# EAGLE board ELEKTRA-PMIC v0.2-ful frame shield for astellated edges adjacent35X25 (EAGLE 9.6.2)
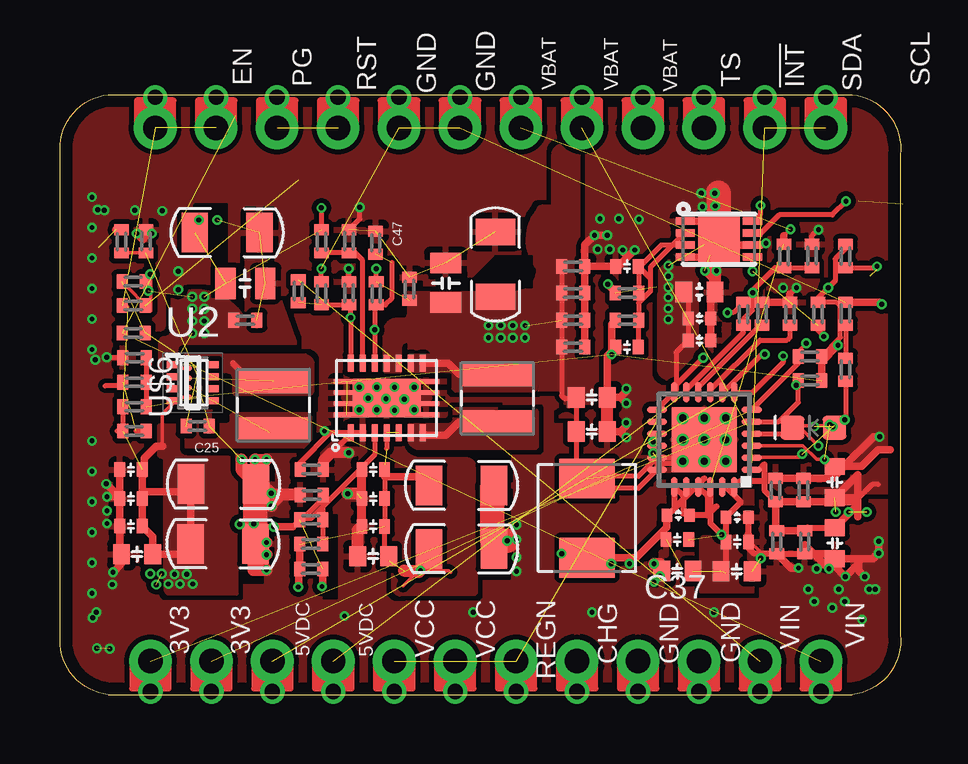
[diagram p0: board, top side]
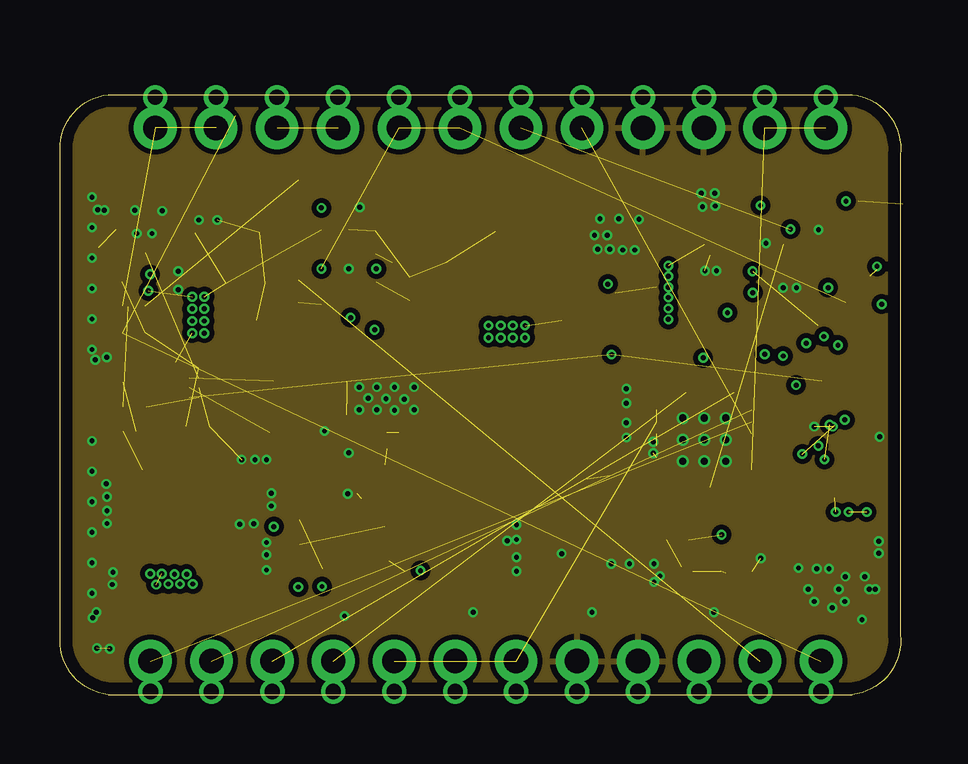
[diagram p1: board, inner layer Route2]
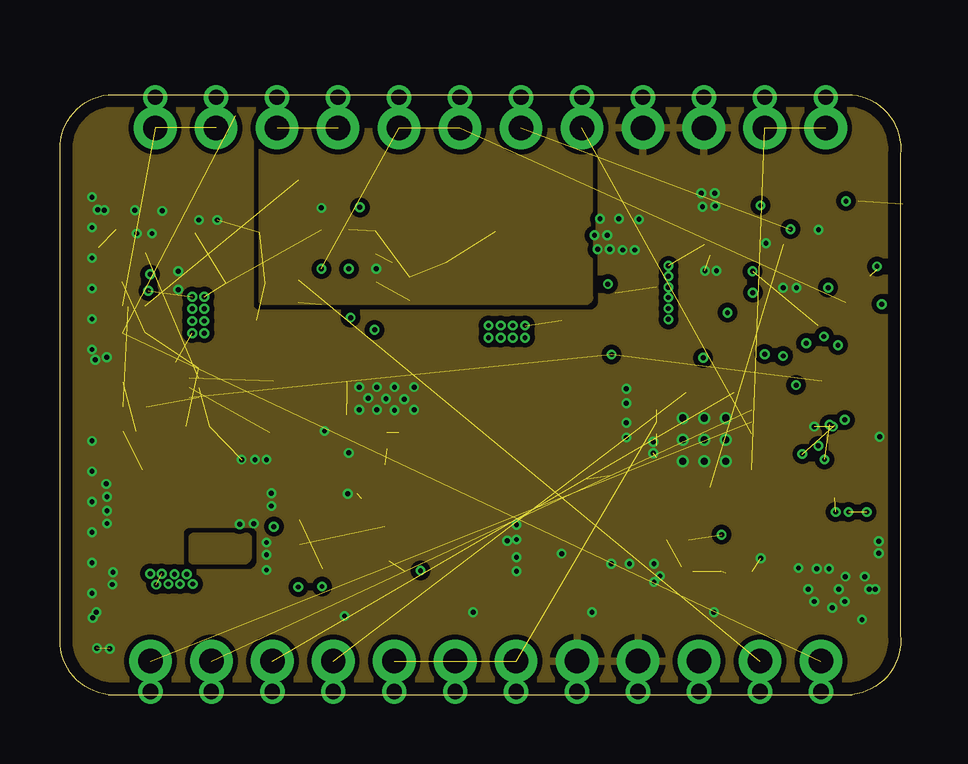
[diagram p2: board, inner layer Route15]
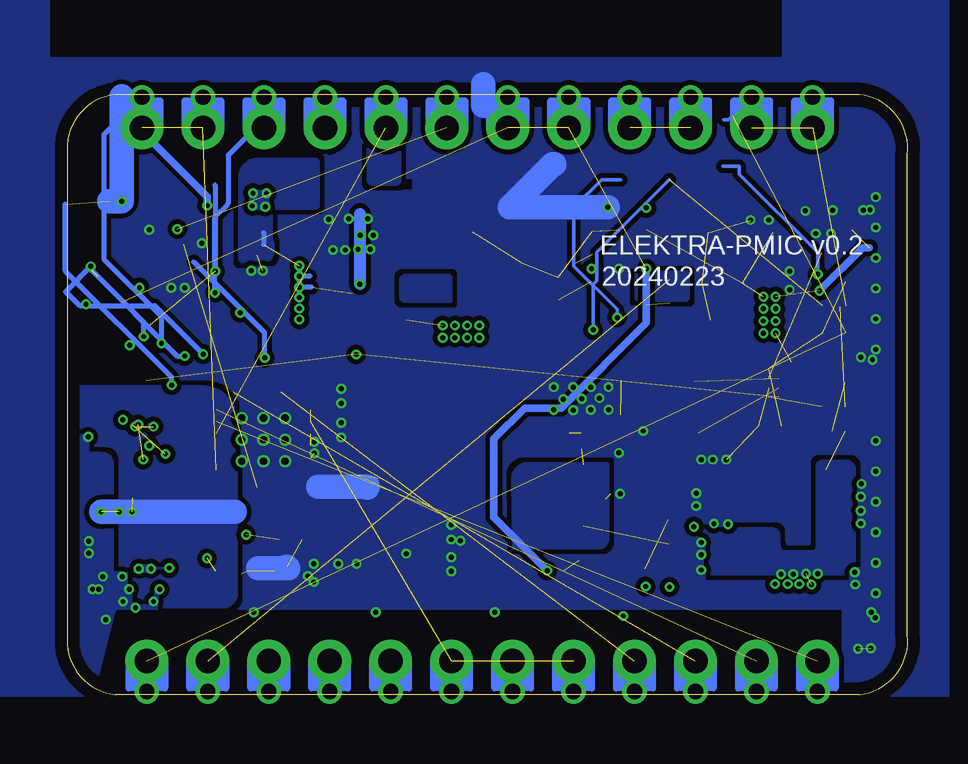
[diagram p3: board, bottom side, seen from below]

Size 35.03 x 25 mm. Coordinates in mm from the lower left corner, seen from the top.
Outline: 2.01,0 33.01,0 arc90 35.01,2.5 35.01,22.5 arc90 33.01,25 2.01,25 arc90 0.01,22.5 0.01,2.5 arc90 2.01,0
Copper layers (1+2*15+16): Top 0.035mm / dielectric 1.5mm / Route2 0.035mm / dielectric 0.15mm / Route15 0.035mm / dielectric 0.2mm / Bottom 0.035mm
Design rules "default *": minimum track width 4mil, minimum drill 8mil, track to track 8mil, track to pad 6mil, pad to pad 6mil, via to via 6mil, smd to smd 6mil, copper to edge 20mil, drill to drill 6mil, minimum pad ring 4mil, minimum via ring 4mil, stop-mask expansion 4mil, vias tented up to drill 16mil, thermal gap 10mil
Net classes: 0 default: width 0.152 mm, drill 0.203 mm, clearance 0.152 mm; 1 power: width 0.254 mm, drill 0.203 mm, clearance 0.203 mm; 3 BAT: drill 0.203 mm, clearance 0.203 mm; 4 3V3: width 0.305 mm, drill 0.203 mm, clearance 0.508 mm; 6 +3V3: width 0.203 mm, drill 0.203 mm, clearance 0.152 mm

## Footprints (pad centres in the part's own frame; a part is rotated, then mirrored left to right if it is on the bottom)
C0402_B = smd 0.457 x 0.61: 1 -0.483,0; 2 0.483,0
C-0402 = smd 0.45 x 0.55: 1 -0.47,0; 2 0.47,0
C0603 = smd 0.7 x 0.85: 1 -0.65,0; 2 0.65,0
C0402 = smd 0.45 x 0.6: 1 -0.47,0; 2 0.47,0
C-0603A = smd 0.7 x 0.85: 1 -0.65,0; 2 0.65,0
C0805 = smd 0.85 x 1.3: 1 -0.8,0; 2 0.85,0
C1206 = smd 1.1 x 1.65: 1 -1.35,0; 2 1.35,0
1X12-CASTELLATED = drill 1.016 pad 1.778: 1 0,-13.97; 2 0,-11.43; 3 0,-8.89; 4 0,-6.35; 5 0,-3.81; 6 0,-1.27; 7 0,1.27; 8 0,3.81; 9 0,6.35; 10 0,8.89; 11 0,11.43; 12 0,13.97 | drill 0.635 pad 1.016: @1 1.27,-13.97; @2 1.27,-11.43; @3 1.27,-8.89; @4 1.27,-6.35; @5 1.27,-3.81; @6 1.27,-1.27; @7 1.27,1.27; @8 1.27,3.81; @9 1.27,6.35; @10 1.27,8.89; @11 1.27,11.43; @12 1.27,13.97
LED-0603 = smd 1 x 1: A -0.877,0; C 0.877,0
INDUCTOR-VLS-E = smd 1 x 3: P$1 -1,0; P$2 1,0
INDUCTOR-4040 = smd 1.65 x 2.3: P$1 -1.65,0; P$2 1.65,0
R0402_B = smd 0.457 x 0.61: 1 -0.483,0; 2 0.483,0
TP0.7MM = smd 0.7 x 0.7: P$1 0,0
QFN24 = smd 0.85 x 0.28: 1 -1.975,1.25; 2 -1.975,0.75; 3 -1.975,0.25; 4 -1.975,-0.25; 5 -1.975,-0.75; 6 -1.975,-1.25; 13 1.975,-1.25; 14 1.975,-0.75; 15 1.975,-0.25; 16 1.975,0.25; 17 1.975,0.75; 18 1.975,1.25 | smd 0.28 x 0.85: 7 -1.25,-1.975; 8 -0.75,-1.975; 9 -0.25,-1.975; 10 0.25,-1.975; 11 0.75,-1.975; 12 1.25,-1.975; 19 1.25,1.975; 20 0.75,1.975; 21 0.25,1.975; 22 -0.25,1.975; 23 -0.75,1.975; 24 -1.25,1.975 | smd 2.7 x 2.7: PAD 0,0 | drill 0.3 pad 0.406: PAD@1 -0.9,0.9; PAD@2 0,0.9; PAD@3 0.9,0.9; PAD@4 -0.9,0; PAD@5 0,0; PAD@6 0.9,0; PAD@7 -0.9,-0.9; PAD@8 0,-0.9; PAD@9 0.9,-0.9
SOT538 = smd 0.475 x 0.3: 1 -0.838,0.754; 2 -0.838,0.254; 3 -0.838,-0.246; 4 -0.838,-0.746; 5 0.838,-0.746; 6 0.838,0.254; 7 0.838,-0.246; 8 0.838,0.754
TDFN-8 = smd 0.8 x 0.3: 1 -1.4,0.75; 2 -1.4,0.25; 3 -1.4,-0.25; 4 -1.4,-0.75; 5 1.4,-0.75; 6 1.4,-0.25; 7 1.4,0.25; 8 1.4,0.75 | smd 1.73 x 1.88: EP 0,0
TPS63020 = smd 0.25 x 0.7: 1 -1.5,-1.45; 2 -1,-1.45; 3 -0.5,-1.45; 4 0,-1.45; 5 0.5,-1.45; 6 1,-1.45; 7 1.5,-1.45; 8 1.5,1.45; 9 1,1.45; 10 0.5,1.45; 11 0,1.45; 12 -0.5,1.45; 13 -1,1.45; 14 -1.5,1.45 | smd 1.1 x 0.2: 15 -1.65,0.69; 16 -1.65,0.23; 17 -1.65,-0.23; 18 -1.65,-0.69; 19 1.65,-0.69; 20 1.65,-0.23; 21 1.65,0.23; 22 1.65,0.69 | smd 2.85 x 1.58: 23 0,0
DSBGA = smd 0.23 x 0.23: A1 -0.2,0.6; A2 0.2,0.6; B1 -0.2,0.2; B2 0.2,0.2; C1 -0.2,-0.2; C2 0.2,-0.2; D1 -0.2,-0.6; D2 0.2,-0.6

## Placement (x,y rotation side)
C1  100pF  [C0402_B]  21.39,16.73 180 top
C2  47nF  [C-0402]  25.76,7.47 180 top
C3  10uF  [C0603]  26.64,16.78 0 top
C4  1000pF  [C0402_B]  21.39,15.6 180 top
C5  10nF  [C0402]  23.63,14.48 180 top
C6  1uF  [C0402]  23.63,17.84 180 top
C7  10uF,25V  [C-0603A]  28.19,5.14 0 top
C8  0.1nF  [C0402_B]  21.39,14.48 180 top
C9  0.1nF  [C0402_B]  30.98,8.53 270 top
C10  100pF  [C0402_B]  29.81,8.53 270 top
C11  1000pF  [C0402_B]  29.87,6.36 90 top
C12  22uF 10V  [C0805]  7.7,17.13 0 top
C13  100nF  [C0402_B]  7.72,15.6 180 top
C14  NC  [C0402_B]  3.1,12 180 top
C15  100uF  [C1206]  6.82,8.77 0 top
C16  22uF  [C-0603A]  3.21,5.85 180 top
C17  0.1uF  [C0402]  28.22,6.36 180 top
C18  100pF  [C0402]  2.96,8.17 180 top
C19  1nF  [C0402]  2.96,9.38 180 top
C20  2.2uF  [C0402_B]  31.03,6.36 90 top
C21  10pF  [C0402_B]  21.39,17.84 180 top
C22  100uF 10V  [C1206]  6.97,19.26 0 top
C23  100uF  [C1206]  6.79,6.28 0 top
C24  0.1uF  [C0402]  2.96,7.02 180 top
C25  10nF  [C0402_B]  5.74,11.19 180 top
C26  22uF 10V  [C0805]  16.08,17.14 90 top
C27  100nF  [C0402_B]  14.57,16.91 270 top
C28  NC  [C0402_B]  10.46,6.27 180 top
C29  100uF  [C1206]  16.73,6.07 0 top
C30  22uF  [C-0603A]  13.05,5.77 180 top
C31  1nF  [C0402]  13.05,9.38 180 top
C32  100pF  [C0402]  13.05,8.17 180 top
C33  100uF 10V  [C1206]  18.14,17.93 90 top
C34  100uF  [C1206]  16.73,8.72 0 top
C35  0.1uF  [C0402]  13.05,7.01 180 top
C36  100nF  [C0402_B]  10.49,9.38 180 top
C37  4.7uF  [C0402]  25.72,6.46 180 top
C47  100nF  [C0402_B]  13.15,18.83 270 top
C49  10uF,25V  [C-0603A]  25.72,5.15 180 top
C57  10uF  [C-0603A]  32.28,6.31 270 top
C58  10uF  [C-0603A]  22.16,10.96 0 top
C59  10uF  [C-0603A]  22.16,12.39 0 top
C64  10uF  [C-0603A]  32.28,8.86 90 top
C72  0.1uF  [C-0402]  26.64,14.76 0 top
C73  1000pF  [C-0402]  26.64,15.68 0 top
C74  1000p  [C-0402]  28.22,7.39 180 top
CONN3  M12PTH-CST-R  [1X12-CASTELLATED]  17.94,23.62 90 top
CONN4  M12PTH-CST-R  [1X12-CASTELLATED]  17.74,1.4 270 top
D5  yellow  [LED-0603]  31.39,11.13 180 top
L1  2.2uH  [INDUCTOR-VLS-E]  8.89,12.07 270 top
L3  2.2uH  [INDUCTOR-VLS-E]  18.23,12.35 270 top
L7  2.2uH  [INDUCTOR-4040]  21.96,7.35 90 top
R1  0R  [R0402_B]  28.48,15.87 270 top
R2  10K  [R0402_B]  31.58,15.87 270 top
R3  10K  [R0402_B]  32.73,18.28 270 top
R4  1.1M  [R0402_B]  10.46,5.24 180 top
R5  180K  [R0402_B]  10.49,8.33 0 top
R6  62K  [R0402_B]  10.46,7.29 180 top
R7  150  [R0402_B]  23.63,15.6 0 top
R8  1M  [R0402_B]  3.1,10.98 180 top
R9  180K  [R0402_B]  3.1,14.04 0 top
R10  10K  [R0402_B]  30.41,15.87 270 top
R11  0R  [R0402_B]  32.73,15.87 90 top
R14  1M  [R0402_B]  3.07,17.21 180 top
R16  1M  [R0402_B]  2.56,18.89 270 top
R17  24K  [R0402_B]  3.1,13.02 180 top
R18  NC  [R0402_B]  3.58,18.89 90 top
R19  1M/NC  [R0402_B]  10.89,16.73 270 top
R20  0R/NC  [R0402_B]  12.04,16.73 90 top
R21  1M  [R0402_B]  13.18,16.73 270 top
R23  1M  [R0402_B]  10.89,18.89 270 top
R24  NC  [R0402_B]  12.04,18.89 90 top
R26  0R  [R0402_B]  9.93,16.8 90 top
R27  0R  [R0402_B]  3.07,15.08 180 top
R28  0R  [R0402_B]  3.07,16.21 180 top
R30  4K7  [R0402_B]  31.25,13.09 180 top
R33  160R  [R0402_B]  29.25,15.87 90 top
R34  31.2K  [R0402_B]  31.33,18.28 90 top
R35  5.49K  [R0402_B]  30.16,18.28 270 top
R36  4K7  [R0402_B]  31.25,14.09 180 top
R44  1K  [R0402_B]  32.73,13.53 90 top
R54  1K  [R0402_B]  23.63,16.73 0 top
TP1  TP  [TP0.7MM]  30.55,11.2 180 top
TP2  TP  [TP0.7MM]  32.28,11.22 180 top
U1  BQ24195L  [QFN24]  26.84,10.62 180 top
U2  TPS631000DRLR  [SOT538]  5.53,12.99 0 top
U4  MAX1704X  [TDFN-8]  27.45,18.99 0 top
U$3  TPS63020  [TPS63020]  13.61,12.36 0 top
U$6  TPS631010  [DSBGA]  5.58,12.99 0 top

## Library data of the parts
C1 = Particle; ITEM_NAME: CAP CER 100pF 50V X7R 0402 10%; ITEM_NUMBER: PT-200138
C2 = particle SZ; ITEM_NAME: CAP CER 0.1uF 16V X7R 0402 10%; ITEM_NUMBER: PT-200005
C3 C37 C58 C59 = particle SZ; ITEM_NAME: CAP CER 10uF 6.3V X5R 0603 10% Low ESR<70mohms; ITEM_NUMBER: PT-200209
C4 = Particle; ITEM_NAME: CAP CER 1000PF 50V X7R 0402 10%
C5 = particle SZ; ITEM_NAME: CAP CER 10nF 16V X5R 0402 10%; ITEM_NUMBER: PT-200136
C6 = particle SZ; ITEM_NAME: CAP CER X5R 1uF 0402 10V ±10% ROHS; ITEM_NUMBER: PT-200695
C7 C49 C57 C64 = particle SZ; ITEM_NAME: CAP CER 100PF 50V C0G/NP0 0603 5%; ITEM_NUMBER: PT-200458
C8 C13 C27 = Particle; ITEM_NAME: CAP CER 0.1UF 16V X7R 0402 10%; ITEM_NUMBER: PT-200649
C9 = Particle; ITEM_NAME: CAP CER 0.1UF 25V X7R 0402 20%; ITEM_NUMBER: PT-200690
C10 = Particle; ITEM_NAME: CAP CER 100PF 1% 50V C0G/NP0 0402; ITEM_NUMBER: 120-00051
C11 = Particle; ITEM_NAME: CAP CER 1000PF 50V X7R 0402 10%; ITEM_NUMBER: PT-200631
C12 C26 = particle SZ; ITEM_NAME: CAP CER 0.1UF 16V X7R 0402 10%; ITEM_NUMBER: 120-00060
C14 C25 C28 C36 C47 CONN3 CONN4 L1 L3 R7 R33 = Particle
C15 C23 C29 C34 = particle SZ; ITEM_NAME: 100UF 20% 6.3V 1206, Low DCL, ESR 0.5Ohm; ITEM_NUMBER: 120-00011
C16 C30 = particle SZ; ITEM_NAME: CAP CER 22UF 10V X5R 0603 20%; ITEM_NUMBER: 120-00061
C17 = RedBear; ITEM_NAME: CAP CER 0.1UF 25V X7R 0402 20%; ITEM_NUMBER: PT-200690
C18 C32 = particle SZ; ITEM_NAME: 100pF 50V X7R 0402 10%; ITEM_NUMBER: PT-200138
C19 C31 C73 = particle SZ; ITEM_NAME: 1000PF 50V X7R 0402 10%; ITEM_NUMBER: PT-200631
C20 = Particle; ITEM_NAME: CAP CER 2.2UF 25V X7S 0603; ITEM_NUMBER: PT-201241
C21 = Particle; ITEM_NAME: CAP CER 10PF 5% 50V C0G/NP0 0402; ITEM_NUMBER: 120-00038
C22 C33 U2 U$3 U$6 = particle SZ
C24 C35 = particle SZ; ITEM_NAME: 0.1UF 16V X7R 0402 10%; ITEM_NUMBER: PT-200649
C72 = particle SZ; ITEM_NAME: CAP CER 0.1UF 16V X7R 0402 10%; ITEM_NUMBER: PT-200649
C74 = particle SZ; ITEM_NAME: CAP CER 1000PF 50V X7R 0402 10%; ITEM_NUMBER: PT-200631
D5 = SparkFun-LED; PROD_ID: DIO-00819
L7 = Particle; ITEM_NAME: FIXED IND 1UH 5.8A 26 MOHM SMD 4020; ITEM_NUMBER: 155-00005
R1 R26 = Spark; ITEM_NAME: RES SMD 0R OHM 5% 1/16W 0402; ITEM_NUMBER: PT-200624
R2 R3 R10 = Spark; ITEM_NAME: 10K OHM 5% 1/16W 0402; ITEM_NUMBER: PT-200004
R4-R6 R9 R18-R20 R24 R27 R28 R34 R35 = Spark
R8 R14 R16 R21 R23 = Spark; ITEM_NAME: RES SMD 1M OHM 1% 1/16W 0402; ITEM_NUMBER: PT-201084
R11 = Particle; ITEM_NAME: RES SMD 0R OHM 5% 1/16W 0402; ITEM_NUMBER: PT-200624
R17 = Spark; ITEM_NAME: RES SMD 24K OHM 1% 1/16W 0402; ITEM_NUMBER: PT-201025
R30 R36 = Particle; ITEM_NAME: RES SMD 4K7 OHM 5% 1/16W 0402; ITEM_NUMBER: PT-200230
R44 R54 = Particle; ITEM_NAME: RES SMD 1K OHM 5% 1/16W 0402; ITEM_NUMBER: PT-200002
TP1 TP2 = Asset Tracker SoM v1.0b
U1 = electron; ITEM_NAME: IC BATT CHG LI-ION 1CELL 24VQFN 2.5A CHG CURRENT; ITEM_NUMBER: 150-00013
U4 = SparkFun-PowerIC; ITEM_NAME: IC 2-WIRE FG MODEL GAUGE LO BATT; ITEM_NUMBER: PT-200141

## Nets
3V3: C14.2 C15.1 C16.1 C18.1 C19.1 C23.1 C24.1 CONN3.11 CONN3.12 R2.1 R3.1 R7.1 R8.2 R28.2 R30.1 R36.1 U$6.D1
5VDC: CONN3.9 CONN3.10
!CE: R10.2 U1.9
!FUEL-INT: CONN4.3 R2.2 U1.7 U4.5
!RST: CONN4.10
BTST: C2.1 U1.21
CHG: CONN3.5 D5.C U1.4
ENABLE: CONN4.12 R27.2
GND: C1.1 C3.2 C4.1 C5.2 C6.2 C7.2 C8.1 C9.1 C10.1 C11.1 C12.2 C13.1 C15.2 C16.2 C17.1 C18.2 C19.2 C20.1 C21.1 C22.2 C23.2 C24.2 C25.1 C26.2 C27.1 C29.2 C30.2 C31.2 C32.2 C33.2 C34.2 C35.2 C36.1 C37.2 C47.1 C49.2 C57.2 C58.2 C59.2 C64.2 C72.2 C73.2 C74.1 CONN3.3 CONN3.4 CONN4.8 CONN4.9 R5.1 R9.1 R10.1 R18.2 R20.2 R24.2 R33.2 R34.2 U1.17 U1.18 U1.PAD U1.PAD@1 U1.PAD@2 U1.PAD@3 U1.PAD@4 U1.PAD@5 U1.PAD@6 U1.PAD@7 U1.PAD@8 U1.PAD@9 U4.1 U4.4 U4.6 U4.EP U$3.2 U$3.15 U$3.16 U$3.17 U$3.18 U$3.19 U$3.20 U$3.21 U$3.22 U$3.23 U$6.C2
ILIM: R33.1 U1.10
N$1: R1.1 U1.12
N$2: R11.1 R44.2
N$3: D5.A R44.1
N$4: TP1.P$1 U1.3
N$5: C14.1 R9.2 R17.1 U$6.D2
N$6: C28.1 R5.2 R6.1 U$3.3
N$7: TP2.P$1 U1.2
N$8: R8.1 R17.2
N$9: R4.1 R6.2
N$11: L3.P$1 U$3.8 U$3.9
N$12: L1.P$1 U$6.B1
N$14: C25.2 R14.2 R27.1 U$6.A2
N$15: R16.2 R18.1 U$6.B2
N$16: L3.P$2 U$3.6 U$3.7
N$17: L1.P$2 U$6.C1
N$19: C36.2 U$3.1
N$20: R19.2 R20.1 R26.1 U$3.14
N$21: C47.2 R21.2 R28.1 U$3.12
N$22: R23.2 R24.1 U$3.13
N$48: C5.1 R7.2 U4.3
N$49: C6.1 R54.2 U4.2
OTG: R3.2 U1.8
PG: CONN4.11 R26.2
PMID: C7.1 C17.2 C49.1 C74.2 U1.23
REGN: C37.1 CONN3.6 R35.1 U1.22
SCL: CONN4.1 R30.2 U1.5 U4.7
SDA: CONN4.2 R36.2 U1.6 U4.8
SW1: C2.2 L7.P$1 U1.19 U1.20
TS: CONN4.4 R1.2 R34.1 R35.2 U1.11
VBAT: C3.1 C72.1 C73.1 CONN4.5 CONN4.6 CONN4.7 R54.1 U1.13 U1.14
VCC: C28.2 C29.1 C30.1 C31.1 C32.1 C34.1 C35.1 CONN3.7 CONN3.8 R4.2 R11.2 R19.1 U$3.4 U$3.5
VIN: C9.2 C10.2 C11.2 C20.2 C57.1 C64.1 CONN3.1 CONN3.2 U1.1 U1.24
VSYS: C1.2 C4.2 C8.2 C12.1 C13.2 C21.2 C22.1 C26.1 C27.2 C33.1 C58.1 C59.1 L7.P$2 R14.1 R16.1 R21.1 R23.1 U1.15 U1.16 U$3.10 U$3.11 U$6.A1

## Tracks (layer width: path | path; a pad name or v marks a point on that pad's centre or on a via)
3.9V
  pour Top (no thermals): 13.48,11.27 14.14,11.27 arc-90 14.22,11.19 14.22,10.63 arc90 15.01,9.84 16.89,9.84 arc-90 17.34,9.39 17.34,4.26 arc-90 17.29,4.2 arc-90 17.24,4.15 14.19,4.15 arc-90 13.86,4.48 13.86,9.69 13.69,9.87 arc90 13.69,9.89 arc-90 13.48,10.1
3V3  (via drill 0.2 pad 0.41)  (7 unrouted)
  Top 0.152: 2.83,16.16 R28.2 | U$6.D1 4.96,12.39 4.26,11.7 4.26,10.35 4.27,10.34
  Top 0.203: C14.2 R8.2 2.37,10.98 | R30.1 R36.1 32.52,14.87 32.52,16.19 32.36,16.35 R2.1 31.58,16.52 v32.01,16.95 32.3,17.24 32.3,18.16 32.73,18.59 R3.1
  Top 0.305: 3.43,8.45 C18.1 C24.1 3.86,6.59 C16.1 5.01,5.85 C23.1 5.44,8.75 C15.1 5.14,8.45 3.43,8.45 | 3.43,8.45 3.43,9.08 | 3.43,9.08 C19.1 | 3.43,9.08 3.5,9.16 3.5,9.84 4,10.34 4.27,10.34 | R7.1 22.98,15.44 v22.98,14.17 | v32.41,14.56 31.73,13.88 R30.1
  other vias: 5.53,4.61 5,4.61 4.52,4.61 4.01,4.59 4.24,5.04 4.77,5.02 5.28,5.02 3.76,5.04
  pour Top (no thermals): 4.16,11.24 4.87,11.24 arc-90 4.92,11.19 4.92,10.28 arc90 5.28,9.92 6.9,9.92 arc-90 7.36,9.46 7.36,4.18 4.57,4.18 arc-90 4.39,4.36 4.39,5.04 arc-90 4.36,5.07 4.36,9.74 arc90 4.21,9.89 arc-90 4.11,10 4.11,11.19 arc-90
  pour Route15: 5.55,5.49 7.66,5.49 arc90 7.94,5.77 7.94,6.53 arc90 7.79,6.68 5.58,6.68 arc90 5.4,6.5 5.4,5.64 arc90
  pour Bottom (no thermals): 2.58,9.73 3.54,9.73 arc-90 3.8,9.48 3.8,6.1 arc90 3.95,5.95 5.09,5.95 arc90 5.35,6.2 5.35,6.61 arc-90 5.65,6.91 8.37,6.91 arc-90 8.8,6.48 8.8,5.39 arc-90 8.45,5.03 2.35,5.03 arc-90 2.2,5.18 2.2,9.35 arc-90
5VDC  (1 unrouted)
!CE
  Top 0.203: U1.9 27.09,12.7 29.17,14.78 30.3,14.78 30.41,14.89 R10.2
!FUEL-INT  (via drill 0.2 pad 0.41)  (3 unrouted)
  Top 0.203: U1.7 28.87,12.6 30.13,13.86 v30.13,14.11 | R2.2 31.58,15.18 v31.83,14.92 | U4.5 v28.85,17.65 v28.86,17.64
  Bottom 0.203: v31.83,14.92 31.83,15.51 33.74,17.43 | v30.13,14.11 30.43,14.11 34.02,17.7 | 28.86,21.23 v28.86,17.64
BTST
  Top 0.254: U1.21 26.98,8.26 26.98,7.48 | C2.1 26.98,7.47 27.34,7.84
CHG  (via drill 0.2 pad 0.41)  (1 unrouted)
  Top 0.152: v31.6,10.37 30.84,11.12 D5.C
  Top 0.203: U1.4 30.27,10.88 D5.C
ENABLE  (2 unrouted)
  Bottom 0.152: 7.66,23.95 7.47,23.95 7.31,24.12
GND  (via drill 0.2 pad 0.41)  (19 unrouted)
  Top 0.152: C10.1 | C74.1 28.69,6.69 | v29.2,5.68 29.2,5.93 28.69,6.44 | U$3.23 13.63,12.36 13.86,12.59 U$3.21 13.38,12.59 | U$3.22 14.24,13.05 13.61,12.41 U$3.23 | U$3.17 12.49,12.13 12.54,12.18 12.54,12.74 v12.47,12.82 13.15,12.82 13.38,12.59 | U$3.23 13.38,12.59 | U$3.20 14.52,12.13 v14.35,12.31 | U$3.19 14.12,11.67 v13.94,11.85
  Top 0.203: R20.2 v12.04,17.74 | U$3.2 12.18,10.91 10.97,9.7 | 10.97,9.75 10.97,9.7 | 10.97,9.7 C36.1 | 12.56,6.99 C35.2 C32.2 12.58,8.39 | 12.58,9.26 C31.2 | 21.87,16.7 C1.1 | 27.29,16.55 C3.2 | U1.17 26.59,9.88 26.34,9.62 25.12,9.62 U1.18 | 30.41,16.68 v30.69,16.95 | R34.2 31.33,19.12 31.58,19.37 v31.61,19.37 | R24.2 12.49,19.82 v12.49,20.31 | R9.1 1.97,14.04 v1.95,14.06 | U4.6 29.42,18.74 v29.42,18.81 | 8.07,6.21 C23.2
  Top 0.254: C74.1 C17.1 28.69,6.11 28.93,5.87 C11.1 C20.1
  Top 0.305: 32.69,9.51 32.28,9.1 | 32.28,9.1 32.19,9.01 C9.1 C10.1 | 32.28,9.1 C64.2 | 24.95,5.02 C49.2 | C19.2 C18.2 | C18.2 C24.2 2.49,5.93 C16.2 2.56,5.45 v2.21,5.1 | C5.2 22.81,14.13 C59.2 23.35,12.39 | C57.2 32.07,5.87 C20.1 31.03,6.25 31.78,5.5 | 34.6,10.21 34.1,10.21 33.4,9.51 C64.2 | C64.2 32.67,9.51 33.9,10.74 v34.15,10.74 | C57.2 33.84,5.66 | v34.12,5.89 34.06,5.89 33.84,5.66 | 33.84,5.66 33.89,5.66 v34.12,5.88 v34.12,6.4 | C57.2 32.28,5.36 v32.73,4.92 33.28,5.48 33.28,5.17 v33.53,4.92 | R18.2 3.58,19.09 | v3.2,19.22 3.45,18.96 3.58,19.09 | 3.58,19.09 3.7,19.22 v3.83,19.22 | C18.2 2.41,8.25 v1.96,8.25 | C18.2 2.49,8.23 v1.93,8.78 | 31.78,5.5 v31.53,5.25 | 31.78,5.5 v32.03,5.25 v32.04,5.25 | v30.77,5.28 30.46,5.28 C11.1 | v23.95,18.53 23.66,18.24 | 23.66,18.24 23.16,17.74 C6.2 C21.1 | 23.66,18.24 23.44,18.45 v23.44,18.53 | C21.1 21.87,18.74 v22.27,19.14 v22.81,19.14 | C8.1 C4.1 21.87,16.7 | C1.1 C21.1 | C17.1 28.69,6.44 28.69,6.69 | 23.35,12.39 v23.6,12.14 | 23.35,12.39 23.6,12.64 v23.6,12.75 | C58.2 23.35,10.96 | 23.35,10.96 v23.6,10.71 | 23.35,10.96 23.6,11.21 v23.6,11.32 | C72.2 C73.2 27.11,16.37 27.29,16.55 | C3.2 27.29,17.25 v26.87,17.67 | 30.41,16.68 R10.1 R33.2 | C31.2 12.58,8.39 | U4.6 27.7,18.74 U4.EP | U4.4 27.04,18.24 27.1,18.3 | U4.1 27.31,19.74 27.45,19.6
  Top 0.381: C35.2 12.58,8.39 12.58,9.26
  Top 0.457: v12.04,10.07 11.29,10.07 10.97,9.75
  Top 0.508: C34.2 18.08,8.01 | v24.75,5.45 25,5.45 25.07,5.38 C49.2 24.97,5.15 | 12.38,8.37 v11.98,8.37 | C30.2 12.4,6.83 12.56,6.99 | R5.1 8.88,8.33 | 8.88,8.33 9.03,8.17 8.9,8.04 C15.2 | 8.88,8.33 v8.81,8.4 8.43,8.77 C15.2 | 8.81,7.95 v8.81,7.86 | C15.2 7.57,9.37 v7.57,9.79 | C15.2 8.17,9.75 v8.12,9.79 v8.61,9.79 | v8.61,5.83 8.59,5.83 C23.2 8.2,6.34 v8.61,6.34 | v8.61,5.2 8.07,5.2 8.07,6.21 | C58.2 C59.2 | U4.EP 27.29,18.82 C3.2
  Top 0.635: 18.08,8.01 C29.2
  Top 1.016: v18.64,6.42 18,6.42 18,8.64 C34.2 | C15.2 8.14,8.75 C23.2 | U4.EP 27.45,19.6 27.45,20.9 27.43,20.92
  Bottom 1.016: 22.53,8.62 22.49,8.66 24.55,8.66 | 17.55,24.54 17.69,24.54 17.69,25.43 | v12.49,20.31 16.59,20.31 14.8,22.1 14.74,22.1 | 25.89,5.33 25.82,5.26 27.07,5.26
  other vias: 13.2,12.82 13.94,12.82 14.75,12.82 12.85,12.36 13.59,12.33 12.47,11.88 13.2,11.88 14.75,11.88 1.33,20.73 1.57,20.21 1.85,20.18 3.12,20.18 4.26,20.16 1.33,19.46 1.33,18.19 1.33,16.92 1.33,15.65 1.33,14.38 1.33,10.57 1.33,9.3 1.33,8.03 1.33,6.76 1.33,5.49 1.33,4.22 31.17,4.39 32.44,4.39 33.71,4.39 1.36,3.21 1.54,1.93 2.07,1.91 31.43,3.88 32.18,3.62 32.7,3.88 33.97,4.39 33.42,3.13 22.5,19.83 1.52,3.43 11.85,3.28 17.21,3.43 22.17,3.43 27.25,3.43 4.92,16.88 4.92,17.64 8.07,7.13 5.79,19.78 6.55,19.78 1.47,13.96 24.72,10.54 24.72,10.06 25,4.94 24.75,4.69 22.97,5.45 32.19,11.17 20.9,5.88 23.73,5.45 31.43,11.17 7.49,7.1 11.02,10.99 19.02,7.07 19.02,6.46 19.02,5.73 19.02,5.14 2.18,4.59 22.91,18.56 22.4,18.56 23.29,19.83 24.13,19.8 27.36,17.67 30.13,16.96 26.77,20.33 27.31,20.36 26.72,20.89 27.28,20.89 1.96,7.66 1.96,7.13
  pour Bottom (rank 3): -1.69,30.84 47.44,30.84 47.44,-0.05 -1.69,-0.05
  pour Top (rank 3): -4.69,33.07 42.58,33.07 42.58,-2.31 -4.69,-2.31
  pour Route2: -3.72,32.13 44.29,32.13 44.29,-1.73 -3.72,-1.73
  cutout Top: 20.93,9.8 24.67,9.8 24.67,8.73 20.93,8.73 20.93,9.23
  cutout Top: 19.76,12.05 19.76,11.6 16.46,11.6
  cutout Top: 7.06,12.38 10.69,12.38 10.69,11.82 7.06,11.82
  cutout Top: 7.49,9.97 8.45,9.97 8.45,4.66 7.49,4.66
  cutout Top: 17.47,9.92 18.74,9.92 18.74,4.84 17.47,4.84
  cutout Bottom: 20.71,21.44 21.02,21.44 21.02,21.11 20.71,21.11
  cutout Top: 15.69,17.34 17.19,17.34 18.13,18.28 19.66,18.28 19.66,16.98 15.69,16.98
  pour Route15 (rank 3): -2.88,31.47 45.84,31.47 45.84,-0.94 -2.88,-0.94
  cutout Top: 6.35,16.57 6.35,18.07 5.58,18.83 5.58,20.38 5.63,20.43 6.96,20.43 6.96,16.6 6.93,16.57
  cutout Top: 10.54,16.98 10.54,16.55 11.2,16.55 11.2,16.98
  cutout Top: 10.99,7.48 10.99,4.02 11.53,4.02 11.53,7.48
  cutout Bottom: 2.81,3.46 32.93,3.46 32.96,3.43 33.69,0.59 32.96,0.59 2.81,0.59
  cutout Bottom: 5.32,29.57 5.32,26.62 35.68,26.62 35.68,29.57
ILIM
  Top 0.203: U1.10 26.59,12.81 29.15,15.37 29.25,15.37 R33.1
N$1  (via drill 0.2 pad 0.41)
  Top 0.203: v26.8,14.03 25.59,12.83 U1.12 | R1.1 28.04,15.91 v27.81,15.91
  Bottom 0.203: 29.07,17.35 27.81,16.09 v27.81,15.91 | 29.76,18.04 26.8,15.08 v26.8,14.03
N$2
  Top 0.203: R11.1 R44.2
N$3
  Top 0.203: R44.1 32.74,13.04 32.74,11.6 D5.A
N$4  (via drill 0.2 pad 0.41)  (1 unrouted)
  Top 0.152: TP1.P$1 32.02,11.2 v32.07,11.25 | v31.85,9.8 31.53,9.8 30.96,10.38 U1.3
N$5  (1 unrouted)
  Top 0.203: 3.59,14.26 R9.2 R17.1 C14.1
N$6
  Top 0.203: U$3.3 13.11,9.99 10.45,7.33 10.12,7.33 10.97,8.18 R5.2 10.95,8.3 R6.1 C28.1
N$7  (via drill 0.2 pad 0.41)  (1 unrouted)
  Top 0.152: U1.2 28.85,9.9 30.81,9.9 v30.93,10.03 | v32.7,11.45 32.47,11.22 TP2.P$1
N$8  (1 unrouted)
  Top 0.203: R8.1 3.16,10.98 | R17.2 2.47,12.87 1.88,12.87
N$9  (via drill 0.2 pad 0.41)  (1 unrouted)
  Top 0.203: R6.2 9.69,7
  Top 0.305: 9.69,7 v8.91,7 | R4.1 10.95,4.54 v10.92,4.51
N$11
  Top 0.305: L3.P$1 16.63,13.35 16.17,13.81 U$3.8
  pour Top (no thermals): 14.6,14.16 19.68,14.16 arc-90 19.83,14.01 19.83,12.79 arc-90 19.68,12.64 16.53,12.64 arc-90 16.38,12.79 16.38,13.35 arc90 16.28,13.45 14.6,13.45 arc-90 14.55,13.5 14.55,14.11 arc-90
N$12  (1 unrouted)
  Top 0.254: L1.P$1 7.95,13.07 7.21,13.81
  pour Top (no thermals): 5.2,14.16 10.13,14.16 arc-90 10.54,13.75 10.54,12.69 arc-90 10.33,12.48 7.34,12.48 arc-90 7.24,12.59 7.24,13.2 arc90 6.98,13.45 5.2,13.45
N$14  (via drill 0.2)  (3 unrouted)
  Top 0.152: R14.2 3.77,16 3.77,17.53 v3.76,17.51
  Bottom 0.152: 7.71,22.02 7.02,22.02 7.02,21.69 3.76,18.43 v3.76,17.51
N$15  (1 unrouted)
  Top 0.152: R16.2 R18.1
N$16
  Top 0.305: L3.P$2 16.62,11.35 16.07,10.81 15.21,10.81 U$3.7
  pour Top (no thermals): 14.55,11.27 16.18,11.27 arc90 16.43,11.52 16.43,11.82 arc-90 16.53,11.93 19.73,11.93 arc-90 19.88,11.77 19.88,10.35 arc-90 19.78,10.25 14.96,10.25 arc-90 14.55,10.66
N$17  (1 unrouted)
  Top 0.305: L1.P$2 8.73,10.91
  pour Top (no thermals): 5.25,11.27 6.98,11.27 arc90 7.13,11.42 7.13,11.62 arc-90 7.24,11.72 10.23,11.72 arc-90 10.44,11.52 10.44,10.45 arc-90 10.28,10.3 5.25,10.3
N$19
  Top 0.203: U$3.1 11.24,10.91 10.01,9.67 C36.2
N$20  (via drill 0.2)  (1 unrouted)
  Top 0.203: R19.2 R20.1 12.11,16.17 v12.11,15.71 U$3.14
  Bottom 0.152: 11.95,21.46 12.74,21.46 13.91,20.3 13.91,17.86 12.11,16.06 v12.11,15.71
N$21  (via drill 0.2)  (2 unrouted)
  Top 0.203: U$3.12 v13.11,15.2 13.11,16.24 R21.2 13.56,16.24 13.84,16.52 13.84,18
  Bottom 0.152: 9.94,21.46 12.97,18.44 12.97,17.24 13.11,17.1 v13.11,15.2
N$22
  Top 0.203: R23.2 R24.1 12.3,18.4 12.61,18.09 U$3.13
N$48
  Top 0.203: U4.3 25.05,18.74 24.11,17.79 R7.2 24.11,14.48 C5.1
N$49
  Top 0.203: R54.2 24.11,16.33 24.61,16.83 24.61,17.08 24.61,17.33 | 24.61,17.33 24.61,17.83 26.02,19.24 U4.2 | 24.61,17.33 C6.1
OTG  (via drill 0.2 pad 0.41)
  Top 0.203: R3.2 33.99,17.8 v34.04,17.84 | U1.8 27.64,12.6 29.23,14.19 v29.36,14.19
  Bottom 0.203: v29.36,14.19 31.38,16.21 34.51,16.21 35.09,16.79 v34.04,17.84
PG  (1 unrouted)
PMID  (2 unrouted)
  Top 0.254: U1.23 27.75,8.65 28.34,8.05 28.34,7.99 C74.2 C17.2 27.75,5.06
  Top 0.305: C49.1 26.25,5.02
  pour Top (no thermals): 28.51,10.59 28.66,10.59 28.66,9.77 arc90 28.94,9.49 28.94,9.39 arc-90 28.87,9.31 28.87,4.26 26.7,4.26 26.7,6.46 arc-90 26.83,6.59 27.97,6.59 arc90 28.51,7.13
REGN  (via drill 0.2 pad 0.41)  (3 unrouted)
  Top 0.152: 30.16,19.12 v30.44,19.39
  Top 0.254: v27.57,6.67 27.09,7.14 U1.22
  Top 0.305: R35.1 30.16,19.12
  Bottom 0.203: v30.44,19.39 30.44,19.34
SCL  (via drill 0.2 pad 0.41)  (2 unrouted)
  Top 0.152: v30.67,12.9 30.77,12.99 R30.2
  Top 0.203: U1.5 29.96,11.38 30.77,12.18 R30.2 | U4.7 29.21,19.24 29.97,19.99 32.18,19.99 v32.75,20.56
  Bottom 0.203: v30.67,12.9 30.67,13.22 35.12,17.67 35.12,20.44
  Bottom 1.016: 32.75,24.93 v32.75,20.56 33.27,20.56
SDA  (via drill 0.2 pad 0.41)  (1 unrouted)
  Top 0.152: R36.2 30.77,14.31 v31.09,14.64
  Top 0.203: R36.2 30.77,13.81 U1.6 | U4.8 28.91,19.74 29.19,20.02 v29.19,20.38
  Bottom 0.203: v31.09,14.64 31.09,15.75 33.49,18.15 33.49,23.33 32.71,24.12 32.71,24.59
  Bottom 0.305: v29.19,20.38 29.19,20.74 32.71,24.26 32.71,24.59
  Bottom 1.016: 32.7,24.6 32.71,24.59
SW1
  Top 0.254: L7.P$1 23.85,5.7 | C2.2 25.33,7.47 25.96,8.11 | 25.96,7.55 25.96,8.28 U1.19 25.59,7.76 26.84,9.02 | U1.20 26.48,8.65
  Top 0.305: C2.2 25.29,6.98 24.02,5.7 L7.P$1
TS  (via drill 0.2 pad 0.41)  (1 unrouted)
  Top 0.203: U1.11 26.09,12.7 28.48,15.08 R1.2 28.48,15.63 28.84,16 28.84,16.73 | R34.1 R35.2 29.8,17.8 28.84,16.84 28.84,16.73 | 28.84,16.73 v28.87,16.75
  Bottom 0.203: v28.87,16.75 28.87,19.91 28.31,20.46 28.31,22.47 26.64,24.14
VBAT  (via drill 0.2 pad 0.41)  (6 unrouted)
  Top 0.203: C3.1 26.17,16.6 C73.1 C72.1 25.67,14.26 25.67,12.68 U1.13
  Top 0.305: R54.1 23.14,16.8 v22.83,17.11
  Bottom 0.203: 24.91,17.44 v25.35,17.44 | 26.84,19.25 26.84,18.75 | 24.84,16.98 v25.35,16.98 | v25.35,17.87 v25.35,16.55
  Bottom 0.508: 22.83,20.03 v22.83,17.11
  other vias: 25.35,16.09 25.35,15.63
  pour Top (no thermals): 25.58,18.81 26.54,18.81 26.54,13.22 arc-90 26.47,13.15 25.37,13.15 arc-90 24.95,13.57 24.95,18.18 arc-90
  pour Bottom (no thermals): 24.68,22.3 27.09,22.3 arc-90 27.85,21.54 27.85,18.24 arc-90 27.6,17.98 26.76,17.98 arc-90 26.51,18.95 26.51,19.97 arc90 26.2,20.27 24.68,20.27 arc-90 24.55,20.4 24.55,22.18 arc-90
VCC  (via drill 0.2 pad 0.41)  (7 unrouted)
  Top 0.152: 16.28,5.09 16.2,5.17 v15.02,5.17 14.96,5.11 | 14.89,5.11 14.3,4.53
  Top 0.203: R19.1 v10.89,17.74 | U$3.4 13.61,10.25 | 13.52,9.58 C31.1 13.52,9.08 C32.1 C35.1 13.52,5.95 C30.1 13.7,5.65 13.7,5.58
  Top 0.305: R11.2 34.16,16.35 v34.24,16.27 | C34.1 15.38,9.08 13.52,9.08 | 13.75,5.7 13.7,5.65 | C28.2 R4.2 9.96,5.21 9.96,4.51 v9.93,4.48
  Top 0.508: C29.1 15.38,5.53 14.96,5.11 14.89,5.11 | 14.34,5.17 v15.02,5.17
  Bottom 0.305: v10.89,17.74 10.89,15.49 14.44,11.94 15.96,11.94 17.25,10.65 17.25,7.4 v15.02,5.17
  pour Bottom (no thermals): 12.48,9.63 15.84,9.63 arc-90 16.47,8.99 16.43,6.1 12.89,6.11 arc-90 12.48,6.52
VIN  (via drill 0.2 pad 0.41)  (4 unrouted)
  Top 0.203: 34.09,8.76 33.84,8.76 33.33,8.25 32.32,8.25 C64.1
  Top 0.254: U1.24 28.34,8.9 29.35,8.9 | C10.2 29.81,8.05 29.35,8.52 29.35,8.9 | U1.1 29.13,9.38 29.35,9.6 29.35,8.9 | C20.2 31.16,6.96 C57.1
  Top 0.305: 33.24,8.04 C9.2 C10.2 29.81,6.89 C11.2 C20.2 | C64.1 33.24,9.17 33.24,8.04 | C57.1 33.24,7.92 | 33.24,7.42 33.24,7.92 | 33.24,7.92 33.24,8.04
  Bottom 1.016: 28.05,7.61 v33.61,7.61
  other vias: 32.85,7.61 32.32,7.61
  pour Top (no thermals): 29.22,11.02 29.98,11.02 arc-90 30.09,10.92 30.09,10.31 arc90 30.21,10.18 34.55,10.18 arc-90 34.85,9.88 34.85,8.58 arc-90 34.67,8.4 30.37,8.4 arc-90 30.26,8.5 30.26,9.64 arc90 30.06,9.85 28.99,9.85 28.99,10.56 29.2,10.56 arc90 29.22,10.59
  pour Bottom (no thermals): 36.79,12.85 29.45,12.85 arc90 27.98,11.38 27.98,4.22 arc90 28.56,3.63 31.71,3.63 arc90 32.8,4.73 32.8,9.78 arc-90 33.39,10.36 36.84,10.36 arc90 37.73,11.25 37.73,11.51 37.73,11.91 arc90
VSYS  (via drill 0.2 pad 0.41)  (10 unrouted)
  Top 0.152: 4.82,13.86 5.09,13.59 U$6.A1
  Top 0.203: R21.1 v13.18,17.74 | v10.89,20.28 R23.1 | C21.2 C1.2 C4.2 C8.2 20.91,12.46 21.04,12.33 21.45,12.33 C59.1 C58.1 21.51,9.46 L7.P$2 | U1.15 24.87,9.87 24.1,9.09 22.98,9.09 22.94,9.14 | U1.16 24.87,9.37 24.1,8.59 22.9,8.59 22.89,8.58
  Top 0.305: R14.1 3.68,17.12 v3.68,16.83 | R16.1 2.33,19.37
  Bottom 0.203: v17.85,15.38 17.8,15.33
  Bottom 0.305: 1.6,18.63 1.88,18.63 v3.68,16.83
  other vias: 5.51,15.06 5.51,15.57 5.51,16.08 5.51,16.58 6.01,15.06 6.01,15.57 6.01,16.08 6.01,16.58 18.36,15.38 18.87,15.38 19.38,15.38 17.85,14.87 18.36,14.87 18.87,14.87 19.38,14.87
  pour Top (no thermals): 26.59,12.83 26.59,12.42 arc-90 26.29,12.12 21.05,12.12 21.05,16.54 arc-90 20.54,17.04 20.54,22.48 arc-90 21,22.94 21.25,22.94 21.61,22.94 21.61,17.96 arc90 21.76,17.81 22.52,17.81 arc-90 22.78,17.55 22.78,14.71 arc90 23.13,14.35 24.66,14.35 arc-90 24.81,14.2 24.81,12.98 arc90 24.96,12.83
  pour Top (no thermals): 13.48,15.08 13.48,13.55 arc90 13.59,13.45 14.19,13.45 14.19,14.47 arc-90 14.45,14.72 19.48,14.72 arc90 19.78,15.02 19.78,16.6 14.72,16.6 arc90 14.51,16.4 14.51,15.85 arc-90 14.3,15.63 14.04,15.63 arc90
  pour Top (no thermals): 4.66,16.6 4.66,15.19 arc-90 4.34,14.87 arc90 4.14,14.67 4.14,13.6 arc90 4.29,13.45 4.85,13.45 arc90 4.87,13.48 4.87,14.34 arc-90 5.18,14.64 9.85,14.64 7.73,20.46 7.73,15.55 arc90
  pour Route15: 8.32,23.42 8.32,16.44 arc90 8.45,16.31 21.91,16.31 arc90 22.16,16.56 22.16,23.17 arc90 21.78,23.55 8.45,23.55 arc90
  pour Top (no thermals): 21.26,20.36 20.09,20.36 arc90 19.91,17.74 19.91,20.18 19.91,17.49 arc90 20.14,17.26 arc-90 20.44,16.96 20.44,16.83 arc-90 20.47,16.85 21.51,16.85 arc90 21.54,16.88 21.54,20.08 arc90
  pour Bottom: 9.21,17.6 11.16,17.6 arc-90 11.34,17.43 11.34,16.54 arc-90 11.24,16.44 9.26,16.44 arc-90 9.13,16.56 9.13,17.53 arc-90
  pour Bottom: 21.37,23.39 22.39,23.39 arc-90 22.49,23.29 22.49,21.46 arc-90 22.29,21.26 21.35,21.26 arc-90 21.15,21.46 21.15,23.17 arc-90
  pour Bottom: 19.14,17.48 20.92,17.48 arc-90 21.15,17.25 21.15,16.61 arc-90 20.92,16.38 19.09,16.38 arc-90 19.01,16.46 19.01,17.35 arc-90
  pour Top (no thermals): 20.81,11.58 21.39,11.58 arc90
  pour Top (no thermals): 14.52,16.78 18.97,16.78 arc90 19.91,17.72 19.91,20.18 arc-90 20.09,20.36 21.33,20.36 21.33,12.15 arc-90 21.15,11.98 21.15,12.28 arc90 20.75,12.69 14.55,12.69 14.55,16.75 arc90

## Text on the board
Top: T1
Route2: G2
Route15: P3
Bottom: B4
tPlace: EN | PG | RST | GND | GND | VBAT | VBAT | VBAT | TS | !INT | SDA | SCL | 3V3 | 3V3 | 5VDC | 5VDC | VCC | VCC | CHG | GND | GND | VIN | VIN | REGN
bPlace: ELEKTRA-PMIC v0.2 | 20240223
Reference: 40*27mm
tDocu: NR3015T2R2M